# Altium PCB MAX51.PcbDoc (part 2 of 3)
Units mil, origin at the board's own origin, x right, y up, seen from the top; angles counter-clockwise.
Board outline 4625 x 3470 mil, 2 copper layers (Top Layer, Bottom Layer); 152 components, 205 nets, 817 pads, 224 vias.
Unrouted connection lines stored in the file: 41.
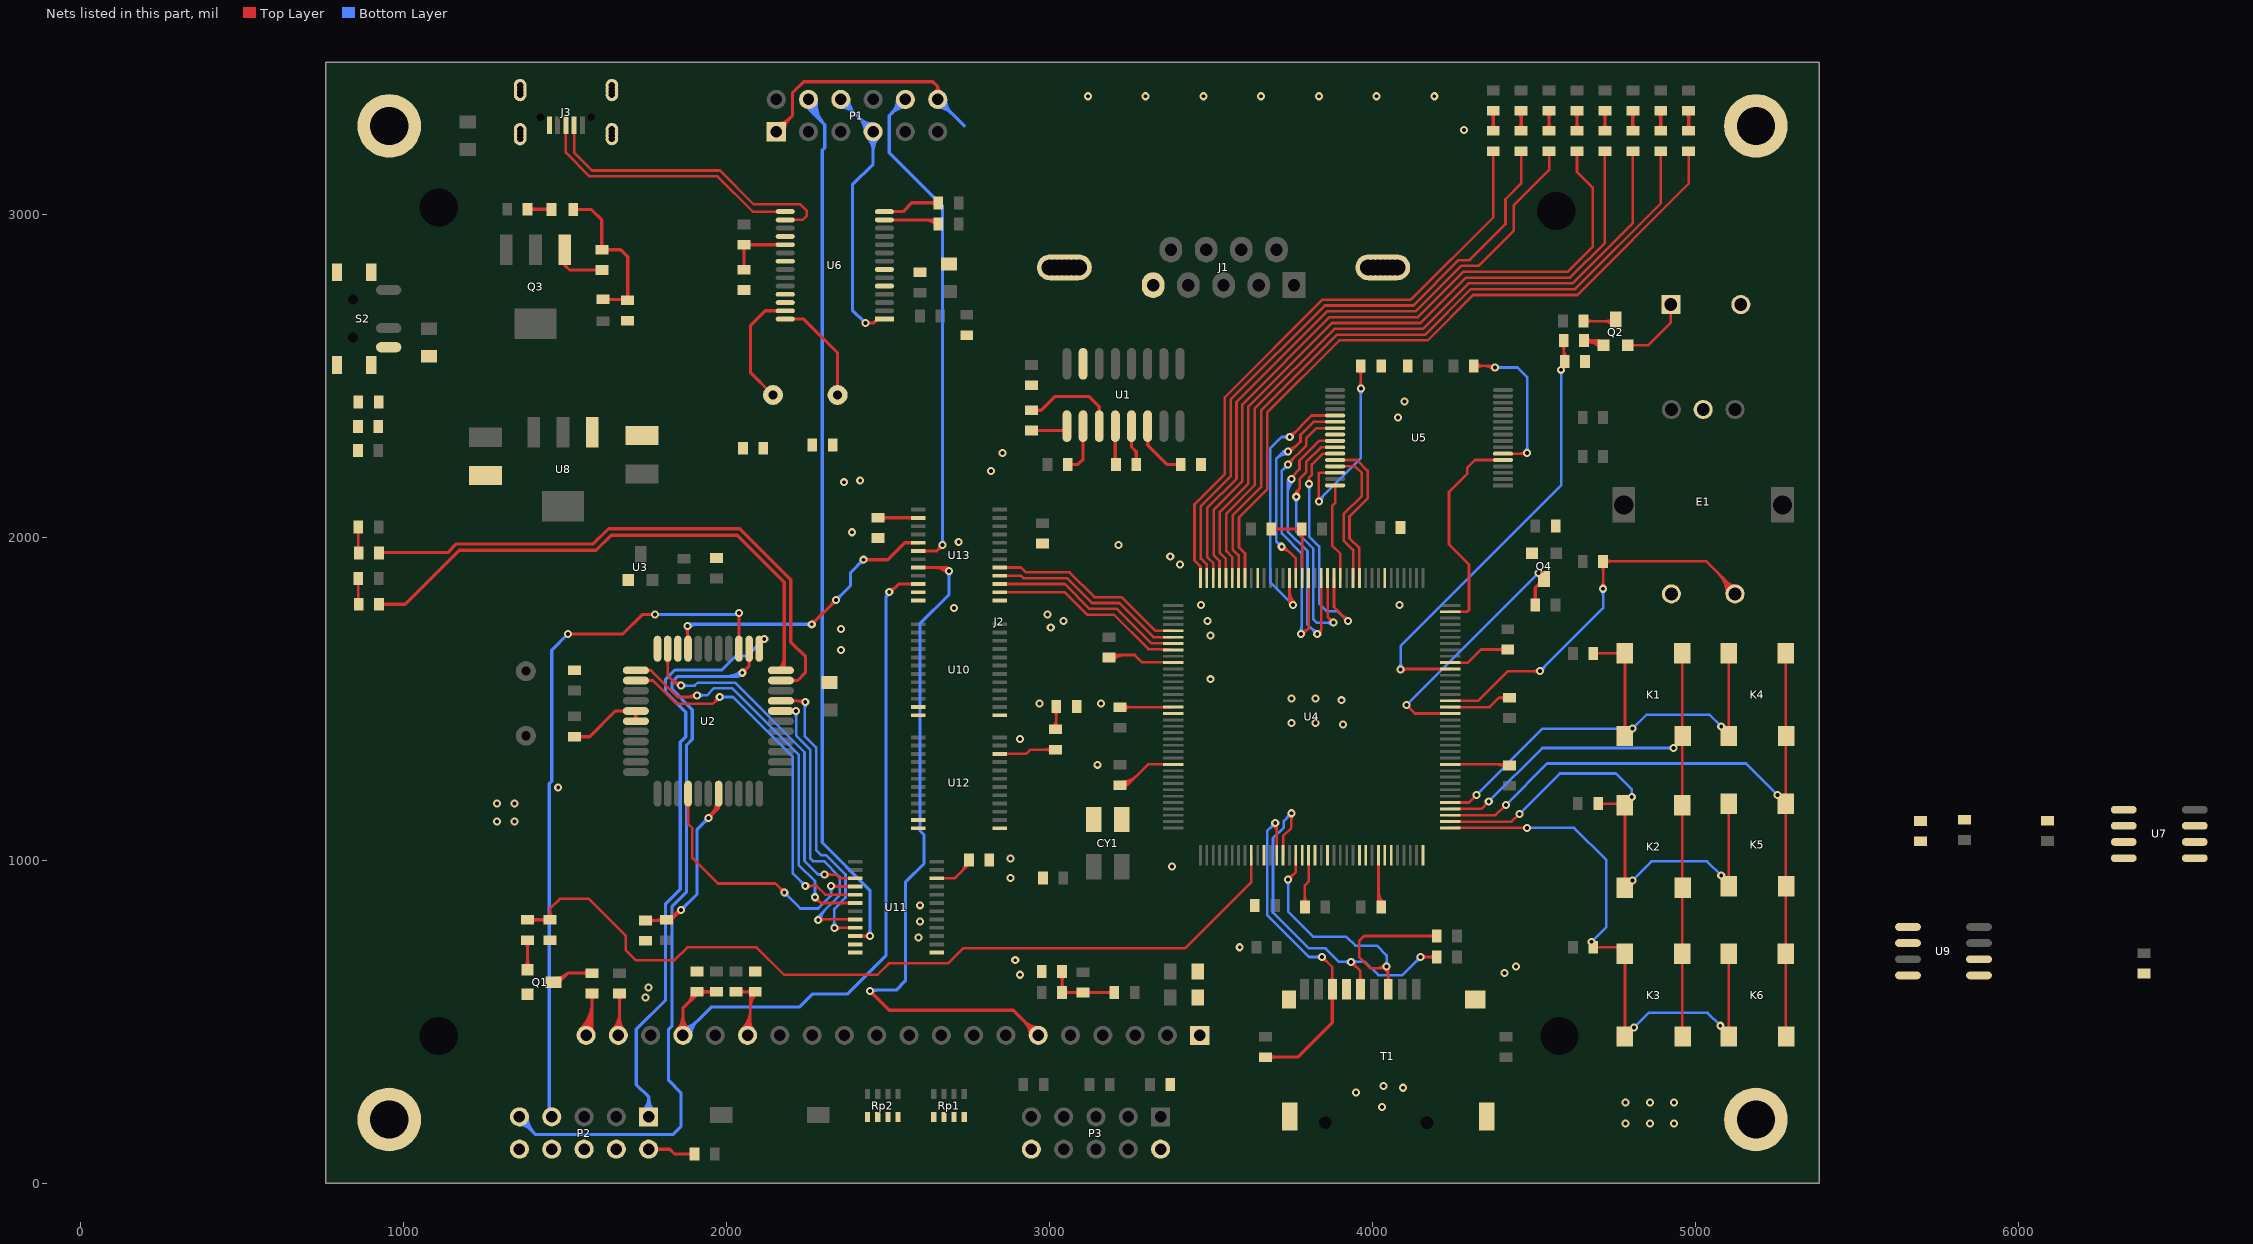
[diagram p2: the nets of this part, all layers, seen from the top]

## Via types
v1: diameter 25, hole 12, Top Layer to Bottom Layer, 224 vias

## Nets (pads, with @x,y where several pads share a name; then routed paths per layer and width w, separated by ;. In a path a pad name is that pad's centre, name@x,y a point inside that pad or via, vN(x,y) a via of type N, cw(c..) or ccw(c..) an arc to the next point about the centre after c; other vN are vias at no path point) (continued)
CE2: R12.1 U5.6 | length 672.4
  Top Layer w8: R12.1@4315,2530 4375,2530 v1(4380,2525) ; R12.1@4322.78,2522.22 cw(c4341.56,2503.44) 4341.56,2530 cw(c4341.56,2556.56) R12.1@4322.78,2537.78 ; 4347.41,2530 cw(c4347.41,2492.41) v1@4373.99,2518.99 ; 4366.72,2530 cw(c4366.72,2511.72) v1@4379.65,2524.65 ; U5.6@4405,2258.43 4478.43,2258.43 v1(4480,2260) ; 4455.68,2258.42 ccw(c4455.68,2284.32) v1@4473.99,2266.01 ; 4463.28,2258.42 cw(c4463.28,2243.28) v1@4473.99,2253.99
  Bottom Layer w8: v1(4380,2525) 4450,2525 4480,2495 v1(4480,2260) ; v1@4386.01,2518.99 cw(c4400.52,2504.48) 4400.52,2525 cw(c4400.52,2545.52) v1@4386.01,2531.01 ; v1@4473.99,2266.01 ccw(c4459.48,2280.52) 4480,2280.52 ccw(c4500.52,2280.52) v1@4486.01,2266.01
CLK_40MHZ: C24.1 CY1.3 U4.18
CPLD_NRST: Q4.C R10.1 U4.91 | length 818.6
  Top Layer w8: v1(4106,1480) 4132.16,1453.84 U4.91@4242.13,1453.84 ; Q4.C@4515,1887 v1(4515,1889)
  Top Layer w10: R10.1@4505,1790 4505,1843 Q4.C@4532,1870
  Bottom Layer w8: v1(4106,1480) v1(4515,1889)
CTL_NOE: R57.2 U11.22 | length 199.9
  Top Layer w8: U11.22@2651.97,943.82 2708.82,943.82 2757,992 R57.2@2757,1010 ; 2727.56,962.56 ccw(c2695.13,995) R57.2@2741,995 ; 2741.22,976.22 ccw(c2722.44,995) R57.2@2749,995
D_N: J3.2 U6.16 | length 967.2
  Top Layer w8: J3.2@1529.41,3275 1529.41,3190.59 1585,3135 1980.46,3135 2085.46,3030 2230,3030 2250,3010 2250,2995 2237.09,2982.09 U6.16@2182.91,2982.09
D_P: J3.3 U6.15 | length 839.2
  Top Layer w8: J3.3@1503.82,3275 1503.82,3190.73 1577.54,3117 1973,3117 2082.32,3007.68 U6.15@2182.91,3007.68
DATA0: U4.130 U5.21 | length 1052.5
  Top Layer w8: 3744.1,1798.2 ccw(c3763.2,1798.2) v1@3749.7,1784.7 ; 3744.1,1817.52 ccw(c3782.52,1817.52) v1@3755.35,1790.35 ; 3744.1,1836.83 ccw(c3801.83,1836.83) v1@3761.01,1796.01 ; U4.130@3744.1,1873.13 3744.1,1800.9 ; v1(3745,2310) 3745,2309.09 3812.45,2376.53 U5.21@3885.31,2376.53 ; v1@3745,2318.5 ccw(c3745,2341.22) 3761.07,2325.16 ; v1@3746.71,1791.88 ccw(c3737.23,1794.02) 3744.1,1800.9 ; v1@3753.12,1798.29 cw(c3750.98,1807.77) 3744.1,1800.9 ; v1@3753.5,2310 cw(c3771.82,2310) 3758.87,2322.95 ; v1(3755,1790) 3744.1,1800.9
  Bottom Layer w8: v1@3738.99,2303.99 ccw(c3724.48,2289.48) 3724.48,2310 ccw(c3724.48,2330.52) v1@3738.99,2316.01 ; v1(3745,2310) 3720,2310 3684.5,2274.5 3684.5,1860.5 v1(3755,1790) ; v1@3746.5,1790 ccw(c3725.98,1790) 3740.49,1804.51 ccw(c3755,1819.02) v1@3755,1798.5
DATA1: U4.129 U5.22 | length 850.4
  Top Layer w8: v1@3720,1961.5 cw(c3720,1922.69) 3747.44,1950.13 ; v1@3720,1969.5 cw(c3720,1950.01) 3733.78,1963.79 ; v1(3720,1970) 3727.57,1970 3763.79,1933.79 U4.129@3763.79,1873.13 ; v1(3740,2265) 3747.48,2265 3778.18,2295.71 3778.18,2316.82 3818.22,2356.85 U5.22@3885.31,2356.85 ; v1@3740,2265.5 ccw(c3740,2284.76) 3753.62,2271.14 ; v1@3740,2273.5 ccw(c3740,2312.07) 3767.27,2284.8
  Bottom Layer w8: v1@3711.5,1970 ccw(c3690.98,1970) 3705.49,1984.51 ccw(c3720,1999.02) v1@3720,1978.5 ; 3715.37,2254.92 cw(c3738.58,2231.71) v1@3739.98,2264.5 ; v1(3720,1970) 3702.5,1987.5 3702.5,2242.04 ; v1@3732.59,2260.83 ccw(c3725.46,2256.81) 3725.46,2265 ; v1@3732.59,2269.17 cw(c3725.46,2273.19) 3725.46,2265 ; v1@3739.64,2256.51 ccw(c3737.52,2207.02) 3702.5,2242.05 ; v1(3740,2265) 3725.46,2265 ; 3702.5,2242.04 3725.46,2265
DATA2: U4.127 U5.23 | length 1073.3
  Top Layer w8: v1(3740,2225) 3740,2227.52 3796.18,2283.71 3796.18,2306.18 3827.16,2337.16 U5.23@3885.31,2337.16 ; v1@3740,2233.5 ccw(c3740,2247.93) 3750.2,2237.73 ; v1@3748.5,2225 cw(c3775.11,2225) 3756.29,2243.82 ; v1(3780,1700) 3786.31,1700 3803.16,1716.84 ; v1@3780.63,1708.48 ccw(c3782.77,1737.23) 3803.16,1716.84 ; U4.127@3803.16,1873.13 3803.16,1716.84
  Bottom Layer w8: v1@3731.5,2225 cw(c3710.98,2225) 3725.49,2210.49 cw(c3740,2195.98) v1@3740,2216.5 ; v1(3740,2225) 3720.5,2205.5 3720.5,2010.5 3781.5,1949.5 3781.5,1701.5 v1(3780,1700) ; v1@3773.99,1706.01 ccw(c3755.86,1724.14) 3781.5,1724.14 ; 3781.5,1716.9 ccw(c3796.9,1716.9) v1@3786.01,1706.01
DATA3: U4.125 U5.25 | length 1051.9
  Top Layer w8: v1@3750,2185 3775.2,2210.2 3775.2,2237.27 3835.73,2297.8 U5.25@3885.31,2297.8 ; v1(3830,1700) 3842.53,1712.53 ; v1@3830.93,1708.45 ccw(c3832.48,1722.58) 3842.53,1712.53 ; v1@3838.45,1700.93 cw(c3852.58,1702.48) 3842.53,1712.53 ; U4.125@3842.53,1873.13 3842.53,1712.53
  Bottom Layer w8: 3738.5,2131.72 cw(c3798.28,2131.72) v1@3756.01,2173.99 ; 3738.5,2151.03 cw(c3778.97,2151.03) v1@3750.35,2179.65 ; 3738.5,2170.34 cw(c3759.66,2170.34) v1@3744.7,2185.3 ; v1(3750,2180) 3738.5,2168.5 3738.5,2017.96 3800,1956.46 3800,1730 v1(3830,1700) ; v1@3821.5,1700 ccw(c3800.98,1700) 3815.49,1714.51 ccw(c3830,1729.02) v1@3830,1708.5
DATA4: U4.124 U5.26 | length 1001.9
  Top Layer w8: v1@3760.63,2132.29 ccw(c3756.02,2140) 3765,2140 ; v1(3765,2125) 3765,2140 ; v1@3765.45,2125.22 cw(c3779.88,2132.21) 3768.54,2143.54 ; v1@3769.37,2132.29 cw(c3773.98,2140) 3765,2140 ; v1@3772.65,2128.7 cw(c3790.6,2137.4) 3776.5,2151.5 ; U4.124@3862.21,1873.13 3862.21,1752.79 v1(3880,1735) ; v1@3871.5,1735 ccw(c3850.98,1735) 3865.49,1749.51 ccw(c3880,1764.02) v1@3880,1743.5 ; U5.26@3885.31,2278.11 3841.5,2278.11 3795.66,2232.27 3795.66,2200.2 3776.5,2181.04 3776.5,2151.5 ; 3765,2140 3776.5,2151.5
  Bottom Layer w8: v1@3758.99,2118.99 cw(c3744.48,2104.48) 3765,2104.48 cw(c3785.52,2104.48) v1@3771.01,2118.99 ; v1(3765,2125) 3765,2016.91 3818,1963.91 3818,1745 3828,1735 v1(3880,1735) ; v1@3873.99,1728.99 ccw(c3859.48,1714.48) 3859.48,1735 ccw(c3859.48,1755.52) v1@3873.99,1741.01
DATA5: U4.123 U5.27 | length 920.1
  Top Layer w8: v1@3799.31,2171.32 ccw(c3787.82,2184.09) 3805,2184.09 ; v1(3805,2165) 3805,2184.09 ; v1@3810.69,2171.32 cw(c3822.18,2184.09) 3805,2184.09 ; U4.123@3881.9,1873.13 3881.9,1783.1 v1(3925,1740) ; U5.27@3885.31,2258.43 3847.27,2258.43 3813.66,2224.82 3813.66,2192.75 3805,2184.09 ; v1@3916.5,1740 ccw(c3895.98,1740) 3910.49,1754.51 ccw(c3925,1769.02) v1@3925,1748.5
  Bottom Layer w8: v1@3798.99,2158.99 cw(c3784.48,2144.48) 3805,2144.48 cw(c3825.52,2144.48) v1@3811.01,2158.99 ; v1(3805,2165) 3805,2002.37 3836,1971.37 3836,1795 3861,1770 3895,1770 v1(3925,1740) ; v1@3916.5,1740 ccw(c3895.98,1740) 3910.49,1754.51 ccw(c3925,1769.02) v1@3925,1748.5
DATA6: U4.119 U5.28 | length 482.6
  Top Layer w8: U5.28@3885.31,2238.74 3952.53,2238.74 3986,2205.27 3986,2120.09 3930,2064.09 3930,1996.37 3960.64,1965.73 U4.119@3960.64,1873.13
DATA7: U4.120 U5.29 | length 451.4
  Top Layer w8: U5.29@3885.31,2219.05 3946.76,2219.05 3968,2197.81 3968,2127.54 3912,2071.54 3912,1988.91 3940.95,1959.96 U4.120@3940.95,1873.13
DI: R28.1 T1.3 U4.52 | length 1315.9
  Top Layer w8: v1(3740,940) 3763.79,963.79 U4.52@3763.79,1014.87 ; v1@3740,948.5 ccw(c3740,969.02) 3754.51,954.51 ccw(c3769.02,940) v1@3748.5,940 ; 4012.41,665 ccw(c4012.41,702.59) v1@4038.99,676.01 ; 4031.72,665 ccw(c4031.72,683.28) v1@4044.65,670.35 ; v1@4038.99,663.99 cw(c4012.41,637.41) 4050,637.41 ; T1.3@4043.08,624.63 ccw(c4026.39,641.33) 4050,641.33 ccw(c4073.61,641.33) T1.3@4056.92,624.63 ; v1@4044.65,669.65 cw(c4031.72,656.72) 4050,656.72 ; v1(4045,670) v1@4050,665 ; T1.3@4050,600 v1@4050,665 ; R28.1@4192.22,757.22 ccw(c4173.44,738.44) 4173.44,765 ccw(c4173.44,791.56) R28.1@4192.22,772.78 ; R28.1@4200,765 3975,765 3960,750 3960,700 3995,665 v1@4050,665
  Bottom Layer w8: v1@3733.99,933.99 cw(c3719.48,919.48) 3740,919.48 cw(c3760.52,919.48) v1@3746.01,933.99 ; v1(3740,940) 3740,841.37 3818.87,762.5 3920.43,762.5 3947.93,735 4015,735 4045,705 v1(4045,670) ; v1@4038.99,676.01 ccw(c4024.48,690.52) 4045,690.52 ccw(c4065.52,690.52) v1@4051.01,676.01
DO: R30.1 T1.7 U4.49 | length 1336.1
  Top Layer w8: v1@3693.99,1108.99 cw(c3668.05,1083.05) 3704.73,1083.05 ; v1@3699.65,1114.65 cw(c3687.37,1102.37) 3704.73,1102.37 ; v1(3700,1115) 3704.73,1110.27 U4.49@3704.73,1014.87 ; v1@3845,691.5 cw(c3845,670.98) 3859.51,685.49 cw(c3874.02,700) v1@3853.5,700 ; v1(3845,700) 3876.77,668.23 T1.7@3876.77,600 ; T1.7@3869.86,624.63 ccw(c3853.16,641.33) 3876.77,641.33 ccw(c3900.38,641.33) T1.7@3883.69,624.63
  Top Layer w10: R30.1@3670,390 3770,390 3876.77,496.77 T1.7@3876.77,600 ; R30.1@3682.07,382.93 cw(c3699.14,365.86) 3699.14,390 cw(c3699.14,414.14) R30.1@3682.07,397.07 ; T1.7@3870.56,576.08 cw(c3855.58,561.09) 3876.77,561.09 cw(c3897.97,561.09) T1.7@3882.98,576.08
  Bottom Layer w8: v1@3691.5,1115 cw(c3670.98,1115) 3685.49,1100.49 cw(c3700,1085.98) v1@3700,1106.5 ; v1(3700,1115) 3675,1090 3675,830 3805,700 v1(3845,700) ; v1@3838.99,693.99 ccw(c3824.48,679.48) 3824.48,700 ccw(c3824.48,720.52) v1@3838.99,706.01
DX: E1.4 R40.1 U4.93 | length 1601.8
  Top Layer w8: U4.93@4242.13,1493.21 4328.21,1493.21 4420,1585 v1(4520,1585) ; v1@4513.99,1578.99 ccw(c4499.48,1564.48) 4499.48,1585 ccw(c4499.48,1605.52) v1@4513.99,1591.01 ; R40.1@4707.22,1912.22 cw(c4688.44,1893.44) 4715,1893.44 cw(c4741.56,1893.44) R40.1@4722.78,1912.22 ; v1@4708.99,1846.01 ccw(c4694.48,1860.52) 4715,1860.52 ccw(c4735.52,1860.52) v1@4721.01,1846.01 ; v1(4715,1840) R40.1@4715,1925 5035,1925 5123.43,1836.57 E1.4@5123.43,1824.13 ; R40.1@4722.78,1917.22 cw(c4741.56,1898.44) 4741.56,1925 cw(c4741.56,1951.56) R40.1@4722.78,1932.78 ; 5071.05,1888.95 cw(c5006.23,1824.13) E1.4@5097.9,1824.13 ; 5084.71,1875.29 cw(c5033.55,1824.13) E1.4@5105.9,1824.13 ; 5098.36,1861.64 cw(c5060.86,1824.13) E1.4@5113.9,1824.13 ; 5101.09,1858.92 ccw(c5123.43,1881.26) E1.4@5123.43,1849.66
  Bottom Layer w8: v1(4520,1585) 4715,1780 v1(4715,1840) ; v1@4520,1593.5 ccw(c4520,1614.02) 4534.51,1599.51 ccw(c4549.02,1585) v1@4528.5,1585 ; v1@4708.99,1833.99 cw(c4694.48,1819.48) 4715,1819.48 cw(c4735.52,1819.48) v1@4721.01,1833.99
E: J2.6 U13.8 | length 2437.3
  Top Layer w10: v1@2445,587.5 cw(c2445,569.39) 2457.8,582.2 cw(c2470.61,595) v1@2452.5,595 ; v1(2445,595) 2505,535 2888.7,535 J2.6@2966.18,457.52 ; U13.8@2595,1905.87 2684.13,1905.87 2690,1900 v1(2690,1895) ; 2645.66,1905.87 cw(c2645.66,1850.66) v1@2684.7,1889.7 ; 2669.8,1905.87 cw(c2669.8,1874.8) v1@2691.77,1896.77 ; J2.6@2941.65,457.52 ccw(c2882.44,457.52) 2924.31,499.39 ccw(c2966.18,541.26) J2.6@2966.18,482.05 ; J2.6@2951.65,457.52 ccw(c2916.58,457.52) 2941.38,482.32 ccw(c2966.18,507.12) J2.6@2966.18,472.05
  Bottom Layer w10: v1(2445,595) 2447.5,597.5 2526.39,597.5 2555,626.11 2555,931.72 2612.5,989.22 2612.5,1079.07 2600,1091.57 2600,1731.72 2690,1821.72 v1@2690,1900 ; v1@2450.3,589.7 cw(c2469.14,570.86) 2469.14,597.5 ; v1@2684.7,1889.7 cw(c2671.89,1876.89) 2690,1876.89 cw(c2708.11,1876.89) v1@2695.3,1889.7
EPM_RXD: P1.4 U11.10 | length 3019.7
  Top Layer w10: U11.10@2400,764.68 2444.68,764.68 v1(2445,765) ; 2426.13,764.68 ccw(c2426.13,783.87) v1@2439.7,770.3 ; 2427.65,764.68 cw(c2427.65,747.65) v1@2439.7,759.7
  Bottom Layer w10: P1.4@2249.57,3355.69 ccw(c2292.1,3350.25) 2261.78,3319.93 ; P1.4@2255,3355 2255,3326.72 2305,3276.72 ; P1.4@2259.49,3354.43 ccw(c2317.64,3346.98) 2276.19,3305.53 ; P1.4@2269.41,3353.16 ccw(c2343.18,3343.71) 2290.59,3291.12 ; P1.4@2279.33,3351.89 ccw(c2368.72,3340.45) 2305,3276.72 ; v1@2439.7,770.3 ccw(c2426.89,783.11) 2445,783.11 ccw(c2463.11,783.11) v1@2450.3,770.3 ; v1(2445,765) 2445,906.87 2297.5,1054.37 2297.5,3197.5 2305,3205 2305,3276.72
EPM_TXD: P1.10 U13.6 | length 1756.5
  Top Layer w10: U13.6@2595,1957.05 2652.05,1957.05 v1(2670,1975) ; v1@2662.5,1975 cw(c2644.39,1975) 2657.2,1962.2 cw(c2670,1949.39) v1@2670,1967.5
  Bottom Layer w10: P1.10@2530.47,3355 cw(c2471.26,3355) 2513.13,3313.13 cw(c2555,3271.26) P1.10@2555,3330.47 ; P1.10@2540.47,3355 cw(c2505.4,3355) 2530.2,3330.2 cw(c2555,3305.4) P1.10@2555,3340.47 ; P1.10@2555,3355 2505,3305 2505,3190 2670,3025 v1(2670,1975) ; v1@2664.7,1980.3 ccw(c2651.89,1993.11) 2670,1993.11 ccw(c2688.11,1993.11) v1@2675.3,1980.3
GND: C2.1 C4.1 C6.2 C8.2 C9.2 C10.2 C11.2 C12.2 C13.2 C14.2 C15.2 C16.2 C17.2 C18.2 C19.2 C20.2 C21.2 C22.2 C24.2 C25.1 C26.1 C27.1 C28.1 C29.2 C30.1 C31.2 C32.1 C33.1 C34.1 C37.2 C38.2 CY1.2 E1.3 E1.5 HL13.k HL14.k J1.0 J1.5 J2.1 J3.0 J3.5 LS1.2 P2.4 P2.6 P2.8 P2.10 P3.2 P3.10 pad.0 Q1.E Q4.E R4.1 R5.1 R6.1 R11.2 R15.2 R17.1 R23.2 R37.2 R50.2 R53.1 R54.1 R57.1 R58.1 R59.2 R60.1 R61.1 Rp1.5 Rp1.6 Rp1.7 Rp1.8 Rp2.5 Rp2.6 Rp2.7 Rp2.8 S2.0 T1.6 T1.10 T1.11 T1.12 T1.13 U1.15 U2.16 U2.17 U3.1 U4.10 U4.17 U4.26 U4.47 U4.54 U4.65 U4.83 U4.92 U4.99 U4.115 U4.128 U4.135 U5.24 U6.7 U6.18 U6.21 U6.25 U6.26 U7.1 U7.2 U7.3 U7.4 U8.1 U9.4 U10.11 U10.12 U10.13 U11.11 U11.12 U11.13 U12.11 U12.12 U12.13 U13.11 U13.12 U13.13 | length 2846.6
  Top Layer w8: R58.1@3012.22,1412.78 ccw(c2988.62,1436.38) 3022,1436.38 ; C24.2@3014.22,1462.22 cw(c2995.44,1443.44) 3022,1443.44 cw(c3048.56,1443.44) C24.2@3029.78,1462.22 ; R58.1@3020,1405 3022,1407 C24.2@3022,1475 ; 3022,1426.73 ccw(c3041.73,1426.73) R58.1@3027.78,1412.78 ; C10.2@3192.12,1624.88 cw(c3216.56,1600.44) 3216.56,1635 ; C10.2@3195,1635 3264.54,1635 3286.54,1613.01 3346.24,1613.01 3346.57,1612.68 3382.51,1612.68 U4.10@3383.87,1611.32 ; C10.2@3197.78,1619.22 cw(c3235.87,1581.13) 3235.87,1635 ; C20.2@3220,1232 3242,1232 ; C21.2@3220,1473 3383.34,1473 U4.17@3383.87,1473.53 ; C20.2@3225,1227 ccw(c3225,1255.97) 3245.49,1235.49 ; C20.2@3225,1235 ccw(c3225,1283.28) 3259.14,1249.14 ; C20.2@3225,1243 ccw(c3225,1310.6) 3272.8,1262.8 ; C21.2@3232.78,1465.22 cw(c3251.56,1446.44) 3251.56,1473 cw(c3251.56,1499.56) C21.2@3232.78,1480.78 ; C20.2@3235.03,1227.49 cw(c3242,1224.36) 3242,1232 ; C20.2@3235.03,1236.51 ccw(c3242,1239.64) 3242,1232 ; U4.26@3383.87,1296.36 3306.36,1296.36 3242,1232 ; C11.2@3688,2025 C12.2@3782,2025 3783.47,2023.53 U4.128@3783.47,1873.13 ; C11.2@3695.78,2017.22 cw(c3714.56,1998.44) 3714.56,2025 cw(c3714.56,2051.56) C11.2@3695.78,2032.78 ; C12.2@3774.22,2012.22 cw(c3751.89,1989.89) 3783.47,1989.89 ; C12.2@3774.22,2017.22 ccw(c3755.44,1998.44) 3755.44,2025 ccw(c3755.44,2051.56) C12.2@3774.22,2032.78 ; 3783.47,1997 cw(c3805,1997) C12.2@3789.78,2012.22 ; C18.2@3784.22,867.78 ccw(c3765.44,886.56) 3792,886.56 ccw(c3818.56,886.56) C18.2@3799.78,867.78 ; C18.2@3792,855 3792,922 3803.16,933.16 U4.54@3803.16,1014.87 ; 4019.69,887.3 ccw(c4055.3,887.3) C17.2@4030.12,862.12 ; 4019.69,906.61 ccw(c4074.61,906.61) C17.2@4035.78,867.78 ; U4.65@4019.69,1014.87 4019.69,863.31 C17.2@4028,855 ; U4.83@4242.13,1296.36 4421.64,1296.36 C16.2@4425,1293 ; U4.92@4242.13,1473.53 4363.53,1473.53 4393,1503 C15.2@4425,1503 ; U4.99@4242.13,1611.32 4296.32,1611.32 4337,1652 C14.2@4420,1652 ; 4385.33,1296.36 cw(c4385.33,1258.33) C16.2@4412.22,1285.22 ; 4401.56,1296.36 ccw(c4401.56,1311.44) C16.2@4412.22,1300.78 ; 4404.64,1296.36 cw(c4404.64,1277.64) C16.2@4417.88,1290.88 ; C14.2@4407.22,1644.22 ccw(c4388.44,1625.44) 4388.44,1652 ccw(c4388.44,1678.56) C14.2@4407.22,1659.78 ; C15.2@4412.22,1495.22 ccw(c4393.44,1476.44) 4393.44,1503 ccw(c4393.44,1529.56) C15.2@4412.22,1510.78
  Top Layer w10: C8.2@1530,1382 1577,1382 1656.5,1461.5 U2.16@1720.59,1461.5 U2.17@1720.59,1430 ; C8.2@1542.07,1374.93 cw(c1559.14,1357.86) 1559.14,1382 cw(c1559.14,1406.14) C8.2@1542.07,1389.07 ; U2.16@1687.23,1456.68 ccw(c1675.6,1445.05) 1675.6,1461.5 ccw(c1675.6,1477.94) U2.16@1687.23,1466.31 ; U2.17@1715.77,1434.82 ccw(c1704.15,1446.44) 1720.59,1446.44 ccw(c1737.03,1446.44) U2.17@1725.41,1434.82 ; U2.16@1715.77,1456.68 cw(c1704.15,1445.05) 1720.59,1445.05 cw(c1737.03,1445.05) U2.16@1725.41,1456.68
  other v1: 4785,185 4860,185 4935,185 4030,235 4785,250 4860,250 4935,250 3950,280 4095,295 4035,300 1750,575 1760,605 2910,645 4410,650 4445,670 2895,690 3590,730 2595,760 2600,810 2600,860 2880,945 3380,980 2880,1005 1290,1120 1345,1120 1290,1175 1345,1175 1480,1225 3150,1295 2910,1375 3910,1420 3750,1425 3825,1425 2970,1485 3160,1485 3905,1495 3750,1500 3825,1500 3500,1560 2355,1650 3500,1695 2355,1715 3005,1720 3045,1740 3490,1740 2995,1760 2705,1780 3470,1790 4085,1790 3405,1915 3375,1940 3215,1975 2720,1985 2390,2015 2365,2170 2415,2175 2820,2205 2855,2260 4080,2370 4100,2420 4285,3260 3120,3365 3298.75,3365 3477.5,3365 3656.25,3365 3835,3365 4013.75,3365 4192.5,3365
ISP_MISO: P2.9 U2.2 | length 2552.5
  Top Layer w10: v1(2050,1580) 2070.98,1600.98 U2.2@2070.98,1654.41 ; v1@2050,1587.5 ccw(c2050,1605.61) 2062.8,1592.8 ccw(c2075.61,1580) v1@2057.5,1580 ; U2.2@2066.17,1621.05 cw(c2054.54,1609.42) 2070.98,1609.42 cw(c2087.43,1609.42) U2.2@2075.8,1621.05
  Bottom Layer w10: P2.9@1360,180.47 cw(c1360,133.33) 1393.34,166.66 ; P2.9@1360,205 1360,200 1410,150 1835,150 1860,175 1860,280 1821.65,318.35 1821.65,475.96 1832.5,486.81 1832.5,856.39 1877.5,901.39 1877.5,1356.39 1895,1373.89 1895,1466.11 1832.5,1528.61 1832.5,1551.39 1849.61,1568.5 2038.5,1568.5 v1(2050,1580) ; P2.9@1374.53,205 ccw(c1421.67,205) 1388.34,171.66 ; P2.9@1384.53,205 ccw(c1455.81,205) 1405.41,154.59 ; 2004.13,1568.5 ccw(c2004.13,1625.87) v1@2044.7,1585.3 ; 2028.27,1568.5 ccw(c2028.27,1601.73) v1@2051.77,1578.23
ISP_MOSI: P2.1 U2.1 | length 1971.1
  Top Layer w10: v1(2118,1685) v1@2122,1681
  Bottom Layer w10: P2.1@1742.66,222.34 ccw(c1700.79,264.21) 1760,264.21 ccw(c1819.21,264.21) P2.1@1777.34,222.34 ; P2.1@1749.73,215.27 ccw(c1724.93,240.07) 1760,240.07 ccw(c1795.07,240.07) P2.1@1770.27,215.27 ; P2.1@1760,205 1760,266.65 1721.65,305 1721.65,475.96 1812.5,566.81 1812.5,864.67 1857.5,909.67 1857.5,1364.68 1875,1382.18 1875,1457.82 1812.5,1520.32 1812.5,1559.68 1841.32,1588.5 1986.87,1588.5 2030.37,1632 2065,1632 v1(2118,1685)
ISP_SCK: P2.7 U2.3 | length 2189.7
  Top Layer w10: v1(1510,1700) 1680,1700 1740,1760 v1(1780,1760) ; U2.3@2039.49,1654.41 2039.49,1764.49 v1(2040,1765)
  Bottom Layer w10: P2.7@1460,205 1452.5,212.5 1452.5,1236.39 1460,1243.89 1460,1650 v1(1510,1700) ; v1(1780,1760) 2035,1760 v1(2040,1765)
KEY_C0: K1.1 K1.3 K2.1 K2.3 K3.1 K3.3 U4.76 | length 1955.2
  Top Layer w8: U4.76@4242.13,1158.57 4338.57,1158.57 v1(4361,1181) ; K1.3@4960,1639.91 K2.3@4960,1169.91 K3.3@4960,709.91 4960,455 K3.1@4961,454
  Bottom Layer w8: v1(4361,1181) 4527,1347 v1(4933,1347)
KEY_C1: K4.1 K4.3 K5.1 K5.3 K6.1 K6.3 U4.75 | length 2339.9
  Top Layer w8: U4.75@4242.13,1138.88 4381.88,1138.88 v1(4414,1171) ; v1(5255,1202) 5281,1176 K4.3@5281,1639.91 ; K6.1@5281,455 K6.3@5281,709.91 K5.3@5281,1174.91
  Bottom Layer w8: v1(4414,1171) 4542,1299 5158,1299 v1(5255,1202)
KEY_L0: K1.2 K1.4 K4.2 K4.4 R24.1 U4.77 | length 1608.8
  Top Layer w8: U4.77@4242.13,1178.25 4299.25,1178.25 v1(4323,1202) ; R24.1@4685,1640 4782.74,1640 K1.4@4782.83,1639.91 K1.2@4782.83,1384 v1(4806,1407.17) ; K4.2@5103.83,1384 K4.4@5103.83,1639.91
  Bottom Layer w8: v1(4323,1202) 4528.17,1407.17 v1(4806,1407.17) 4848.83,1450 5045,1450 v1(5081,1414)
KEY_L1: K2.2 K2.4 K5.2 K5.4 R25.1 U4.74 | length 1614.9
  Top Layer w8: U4.74@4242.13,1119.2 4432.2,1119.2 v1(4456,1143) ; R25.1@4700,1175 4777.74,1175 K2.4@4782.83,1169.91 K2.2@4782.83,914 v1(4806,937.17) ; K5.2@5103.83,919 K5.4@5103.83,1174.91
  Bottom Layer w8: v1(4456,1143) 4581,1268 4755,1268 4804,1219 v1(4804,1195) ; v1(4806,937.17) 4864.83,996 5037,996 v1(5081,952)
KEY_L2: K3.2 K3.4 K6.2 K6.4 R26.1 U4.73 | length 1767.7
  Top Layer w8: U4.73@4242.13,1099.51 v1(4479.51,1099.51) ; R26.1@4679,736 v1(4679,747) ; R26.1@4685,730 4762.74,730 K3.4@4782.83,709.91 K3.2@4782.83,454 v1(4811,482.17) ; K6.2@5103.83,454 K6.4@5103.83,709.91
  Bottom Layer w8: v1(4479.51,1099.51) 4625.49,1099.51 4725,1000 4725,793 v1(4679,747) ; v1(4811,482.17) 4855.83,527 5039,527 5078,488 v1(5078,487)
LCD_E: U4.6 U13.16 | length 615.7
  Top Layer w8: U13.16@2846.97,1880.28 2912.9,1880.28 2920.18,1873 3055.63,1873 3132.63,1796 3217.18,1796 3323.11,1690.06 U4.6@3383.87,1690.06
LCD_NRST: U4.8 U13.14 | length 610.8
  Top Layer w8: U13.14@2846.97,1829.09 3048.63,1829.09 3117.72,1760 3200,1760 3307,1653 3345.62,1653 3346.57,1652.05 3368.6,1652.05 3369.95,1650.69 U4.8@3383.87,1650.69
LCD_RS: U4.7 U13.15 | length 613.2
  Top Layer w8: U13.15@2846.97,1854.68 3048.49,1854.68 3125.18,1778 3209.72,1778 3316.72,1671 3375.1,1671 3375.72,1670.38 U4.7@3383.87,1670.38
LCD_RW: U4.5 U13.17 | length 618.1
  Top Layer w8: U13.17@2846.97,1905.87 2912.77,1905.87 2927.63,1891 3063.09,1891 3140.09,1814 3224.63,1814 3328.89,1709.75 U4.5@3383.87,1709.75
LED_CTL: R22.1 R23.1 U4.45 | length 2764.1
  Top Layer w8: R23.1@1447.22,822.78 ccw(c1428.44,841.56) 1455,841.56 ccw(c1481.56,841.56) R23.1@1462.78,822.78 ; R23.1@1455,815 1455,850 1485,880 1575,880 1689,766 1689,721 1720,690 1840,690 1880,730 2094.54,730 2179.54,645 2469.24,645 2504.24,680 2686.99,680 2733.77,726.78 3419.97,726.78 3625.99,932.8 U4.45@3625.99,1014.87
  Top Layer w10: R22.1@1385,815 R23.1@1455,815 ; R22.1@1397.07,807.93 cw(c1414.14,790.86) 1414.14,815 cw(c1414.14,839.14) R22.1@1397.07,822.07 ; R23.1@1442.93,807.93 ccw(c1425.86,790.86) 1425.86,815 ccw(c1425.86,839.14) R23.1@1442.93,822.07
LEDA: J2.19 R20.2 | length 299.8
  Top Layer w10: J2.19@1648.84,474.86 ccw(c1597.75,525.95) 1670,525.95 ; J2.19@1655.91,467.79 ccw(c1621.89,501.81) 1670,501.81 ; R20.2@1662.93,579.93 cw(c1645.86,562.86) 1670,562.86 cw(c1694.14,562.86) R20.2@1677.07,579.93 ; J2.19@1666.18,457.52 1670,461.34 R20.2@1670,587 ; 1670,507.51 ccw(c1716.18,507.51) J2.19@1683.52,474.86
LIB: U2.10 U11.3 | length 1314.2
  Top Layer w8: U2.10@1813.49,1620.34 cw(c1800.16,1607.01) 1819.02,1607.01 cw(c1837.87,1607.01) U2.10@1824.54,1620.34 ; U2.10@1819.02,1654.41 1819.02,1570.98 1850,1540 v1(1860,1540) ; 1828.42,1561.58 ccw(c1860,1593.16) v1@1860,1548.5 ; 1842.08,1547.92 ccw(c1860,1565.85) v1@1860,1540.5 ; v1(2305,955) 2340,955 2351.18,943.82 U11.3@2400,943.82 ; v1@2311.01,948.99 cw(c2325.52,934.48) 2325.52,955 cw(c2325.52,975.52) v1@2311.01,961.01
  Bottom Layer w8: v1(1860,1540) 1902.52,1540 1912.02,1549.5 2026.87,1549.5 2242.5,1333.87 2242.5,997.5 2285,955 ; v1@1866.01,1533.99 cw(c1880.52,1519.48) 1880.52,1540 cw(c1880.52,1560.52) v1@1866.01,1546.01 ; v1@2298.88,949.1 ccw(c2285,935.72) 2285,955 ; v1@2298.88,960.9 cw(c2285,974.28) 2285,955 ; v1@2310,955 2285,955
N5LED1: HL2.k U2.43 | length 1790.1
  Top Layer w10: HL2.k@925,1952 1137.72,1952 1164.72,1979 1588.72,1979 1635.72,2026 2042.28,2026 2200,1868.28 2200,1675 2246,1629 2246,1581 2220.98,1555.98 U2.43@2169.41,1555.98 ; U2.43@2202.77,1551.17 cw(c2214.4,1539.54) 2214.4,1555.98 cw(c2214.4,1572.43) U2.43@2202.77,1560.8
N5LED2: HL1.k U2.44 | length 1744.7
  Top Layer w10: HL1.k@925,1792 1006,1792 1173,1959 1597,1959 1644,2006 2034,2006 2180,1860 2180,1598.07 U2.44@2169.41,1587.48 ; U2.44@2164.59,1592.3 ccw(c2127.4,1629.49) 2180,1629.49 ; U2.44@2171.66,1585.23 ccw(c2151.54,1605.35) 2180,1605.35
NCE1: R11.1 U5.30 | length 776.9
  Top Layer w8: v1@3828.99,2116.01 ccw(c3814.48,2130.52) 3835,2130.52 ccw(c3855.52,2130.52) v1@3841.01,2116.01 ; v1(3835,2110) 3835,2198.34 3836.03,2199.37 U5.30@3885.31,2199.37 ; R11.1@3957.22,2517.22 cw(c3938.44,2498.44) 3965,2498.44 cw(c3991.56,2498.44) R11.1@3972.78,2517.22 ; v1@3958.99,2466.01 ccw(c3944.48,2480.52) 3965,2480.52 ccw(c3985.52,2480.52) v1@3971.01,2466.01 ; v1(3965,2460) R11.1@3965,2530
  Bottom Layer w8: v1(3835,2110) 3835,2115 3965,2245 v1(3965,2460) ; v1@3843.5,2110 cw(c3876.09,2110) 3853.05,2133.05 ; v1@3958.99,2453.99 cw(c3944.48,2439.48) 3965,2439.48 cw(c3985.52,2439.48) v1@3971.01,2453.99
NEA: R3.1 R4.2 U2.29 | length 931.5
  Top Layer w8: R3.1@1813,813 R3.1@1815,815
  Top Layer w10: R4.2@1750,813 1813,813 1828,813 v1(1860,845) ; R4.2@1762.07,805.93 cw(c1779.14,788.86) 1779.14,813 cw(c1779.14,837.14) R4.2@1762.07,820.07 ; 1781.03,813 ccw(c1781.03,843.97) R3.1@1802.93,822.07 ; 1790.69,813 cw(c1790.69,795.69) R3.1@1802.93,807.93 ; R3.1@1820,815 ccw(c1820,839.14) 1837.07,822.07 ; R3.1@1820,825 ccw(c1820,873.28) v1@1854.14,839.14 ; 1840.91,831.5 ccw(c1828.19,853.52) v1@1852.76,846.94 ; 1849.87,836.68 cw(c1855.27,827.34) v1@1858.06,837.76 ; v1@1852.5,845 cw(c1834.39,845) 1847.2,832.2 cw(c1860,819.39) v1@1860,837.5 ; v1@1943.06,1137.24 ccw(c1935.5,1165.44) 1960.79,1150.85 ; v1(1945,1130) 1976.5,1161.5 ; v1@1945,1137.5 ccw(c1945,1155.61) 1957.8,1142.8 ccw(c1970.61,1130) v1@1952.5,1130 ; v1@1946.95,1137.24 ccw(c1948.76,1143.99) 1954.81,1140.5 ; 1953.87,1138.87 ccw(c1915.7,1177.05) U2.29@1969.69,1177.05 ; 1970.94,1155.94 ccw(c1949.84,1177.05) U2.29@1979.69,1177.05 ; U2.29@1971.88,1172.04 cw(c1962.15,1161.5) 1976.5,1161.5 ; U2.29@1976.5,1205.59 1976.5,1161.5 ; U2.29@1981.11,1172.04 ccw(c1990.84,1161.5) 1976.5,1161.5
  Bottom Layer w10: v1(1860,845) 1910,895 1910,1095 v1(1945,1130) ; v1@1860,852.5 ccw(c1860,870.61) 1872.8,857.8 ccw(c1885.61,845) v1@1867.5,845 ; v1@1937.5,1130 cw(c1919.39,1130) 1932.2,1117.2 cw(c1945,1104.39) v1@1945,1122.5
NetC1_1: C1.1 U1.1 | length 115.6
  Top Layer w10: C1.1@2945,2330 3041.46,2330 U1.1@3055,2343.54
NetC1_2: C1.2 U1.3 | length 300.7
  Top Layer w10: C1.2@2945,2393 2975,2393 3017,2435 3124,2435 3155,2404 U1.3@3155,2343.54
NetC3_2: C3.2 U1.2 | length 156.2
  Top Layer w10: C3.2@3058,2225 3089,2225 3105,2241 U1.2@3105,2343.54
NetC4_2: C4.2 U1.6 | length 186
  Top Layer w10: U1.6@3305,2343.54 3305,2284 3364,2225 C4.2@3407,2225
NetC5_1: C5.1 U1.5 | length 124.8
  Top Layer w10: U1.5@3255,2343.54 3255,2279 3270,2264 C5.1@3270,2225
NetC5_2: C5.2 U1.4 | length 119.4
  Top Layer w10: U1.4@3205,2343.54 3205,2227 C5.2@3207,2225
NetC23_1: C23.1 C35.2 R52.1 R53.2 | length 494.6
  Top Layer w10: C35.2@1527,3014 1583,3014 1615,2982 R52.1@1615,2890 1673,2890 1695,2868 R53.2@1695,2733 1692,2736 C23.1@1619,2736
NetC29_1: C29.1 U6.28 Y2.2 | length 335.6
  Top Layer w10: U6.28@2182.91,2675 2240,2675 2345,2570 Y2.2@2345,2440
NetC31_1: C31.1 U6.27 Y2.1 | length 370.8
  Top Layer w10: Y2.1@2145,2440 2075,2510 2075,2655 2120.59,2700.59 U6.27@2182.91,2700.59
NetC32_2: C32.2 R46.1 U6.19 | length 205
  Top Layer w10: C32.2@2055,2828 R46.1@2055,2905 2182.6,2905 U6.19@2182.91,2905.32
NetC35_1: C35.1 R51.1 | length 74.4
  Top Layer w10: R51.1@1385,3015 1458,3015 C35.1@1459,3014
NetHL1_A: HL1.a R1.1 | length 80.1
  Top Layer w8: R1.1@861,1871.67 861,1793 HL1.a@862,1792
NetHL2_A: HL2.a R2.1 | length 80.1
  Top Layer w8: R2.1@861,2031 861,1952.33 HL2.a@862,1951.33
NetHL3_A: HL3.a R31.1 | length 137.8
  Top Layer w10: HL3.a@4972.93,3265.07 ccw(c4955.86,3282.14) 4980,3282.14 ccw(c5004.14,3282.14) HL3.a@4987.07,3265.07 ; R31.1@4972.93,3312.93 cw(c4955.86,3295.86) 4980,3295.86 cw(c5004.14,3295.86) R31.1@4987.07,3312.93 ; HL3.a@4980,3258 R31.1@4980,3320
NetHL4_A: HL4.a R32.1 | length 137.8
  Top Layer w10: HL4.a@4886.5,3265.07 ccw(c4869.43,3282.14) 4893.57,3282.14 ccw(c4917.71,3282.14) HL4.a@4900.64,3265.07 ; R32.1@4886.5,3312.93 cw(c4869.43,3295.86) 4893.57,3295.86 cw(c4917.71,3295.86) R32.1@4900.64,3312.93 ; HL4.a@4893.57,3258 R32.1@4893.57,3320
NetHL5_A: HL5.a R33.1 | length 137.8
  Top Layer w10: HL5.a@4800.07,3265.07 ccw(c4783,3282.14) 4807.14,3282.14 ccw(c4831.28,3282.14) HL5.a@4814.21,3265.07 ; R33.1@4800.07,3312.93 cw(c4783,3295.86) 4807.14,3295.86 cw(c4831.28,3295.86) R33.1@4814.21,3312.93 ; HL5.a@4807.14,3258 R33.1@4807.14,3320
NetHL6_A: HL6.a R35.1 | length 137.8
  Top Layer w10: HL6.a@4713.64,3265.07 ccw(c4696.57,3282.14) 4720.71,3282.14 ccw(c4744.86,3282.14) HL6.a@4727.79,3265.07 ; R35.1@4713.64,3312.93 cw(c4696.57,3295.86) 4720.71,3295.86 cw(c4744.86,3295.86) R35.1@4727.79,3312.93 ; HL6.a@4720.71,3258 R35.1@4720.71,3320
NetHL7_A: HL7.a R41.1 | length 137.8
  Top Layer w10: HL7.a@4627.21,3265.07 ccw(c4610.14,3282.14) 4634.29,3282.14 ccw(c4658.43,3282.14) HL7.a@4641.36,3265.07 ; R41.1@4627.21,3312.93 cw(c4610.14,3295.86) 4634.29,3295.86 cw(c4658.43,3295.86) R41.1@4641.36,3312.93 ; HL7.a@4634.29,3258 R41.1@4634.29,3320
NetHL8_A: HL8.a R42.1 | length 137.8
  Top Layer w10: HL8.a@4540.79,3265.07 ccw(c4523.71,3282.14) 4547.86,3282.14 ccw(c4572,3282.14) HL8.a@4554.93,3265.07 ; R42.1@4540.79,3312.93 cw(c4523.71,3295.86) 4547.86,3295.86 cw(c4572,3295.86) R42.1@4554.93,3312.93 ; HL8.a@4547.86,3258 R42.1@4547.86,3320
NetHL9_A: HL9.a R43.1 | length 137.8
  Top Layer w10: HL9.a@4454.36,3265.07 ccw(c4437.29,3282.14) 4461.43,3282.14 ccw(c4485.57,3282.14) HL9.a@4468.5,3265.07 ; R43.1@4454.36,3312.93 cw(c4437.29,3295.86) 4461.43,3295.86 cw(c4485.57,3295.86) R43.1@4468.5,3312.93 ; HL9.a@4461.43,3258 R43.1@4461.43,3320
NetHL10_A: HL10.a R44.1 | length 137.8
  Top Layer w10: HL10.a@4367.93,3265.07 ccw(c4350.86,3282.14) 4375,3282.14 ccw(c4399.14,3282.14) HL10.a@4382.07,3265.07 ; R44.1@4367.93,3312.93 cw(c4350.86,3295.86) 4375,3295.86 cw(c4399.14,3295.86) R44.1@4382.07,3312.93 ; HL10.a@4375,3258 R44.1@4375,3320
NetHL13_A: HL13.a R45.1
NetJ2_20: J2.20 R21.2 | length 449.3
  Top Layer w10: J2.20@1548.84,474.86 ccw(c1461.53,562.17) 1585,562.17 ; J2.20@1555.91,467.79 ccw(c1485.68,538.03) 1585,538.03 ; J2.20@1562.98,460.72 ccw(c1509.82,513.88) 1585,513.88 ; J2.20@1566.18,457.52 1585,476.34 R21.2@1585,587 ; J2.20@1570.05,453.65 ccw(c1533.96,489.74) 1585,489.74 ; R21.2@1577.93,579.93 cw(c1560.86,562.86) 1585,562.86 cw(c1609.14,562.86) R21.2@1592.07,579.93
NetLS1_1: LS1.1 Q2.E | length 218.9
  Top Layer w8: Q2.E@4791.22,2593.78 4854.78,2593.78 4925,2664 LS1.1@4925,2720
NetP2_2: P2.2 R7.2 | length 148.2
  Top Layer w10: P2.2@1760,105 1825,105 1840,90 R7.2@1902,90
NetQ1_B: Q1.B R22.2 | length 179.2
  Top Layer w10: Q1.B@1375.81,669.19 ccw(c1353.62,691.38) 1385,691.38 ccw(c1416.38,691.38) Q1.B@1394.19,669.19 ; R22.2@1377.93,744.93 cw(c1360.86,727.86) 1385,727.86 cw(c1409.14,727.86) R22.2@1392.07,744.93 ; Q1.B@1385,660 R22.2@1385,752
NetQ1_C: Q1.C R21.1 | length 235
  Top Layer w10: Q1.C@1465,622 1482,622 1510,650 ; Q1.C@1472.08,625 ccw(c1472.87,654.25) 1493.56,633.56 ; Q1.C@1472.35,635 ccw(c1473.73,686.26) 1510,650 ; R21.1@1572.93,642.93 ccw(c1555.86,625.86) 1555.86,650 ccw(c1555.86,674.14) R21.1@1572.93,657.07 ; R21.1@1585,650 1510,650
NetQ2_B: Q2.B R36.1 | length 265.5
  Top Layer w8: R36.1@4664,2601 cw(c4682.78,2582.22) 4682.78,2608.78 cw(c4682.78,2635.33) R36.1@4664,2616.56 ; R36.1@4665.2,2597.42 cw(c4676,2589.78) 4679.42,2602.56 ; R36.1@4665.75,2609.28 ccw(c4674.46,2614.31) 4671.86,2604.59 ; 4672.78,2608.78 cw(c4672.78,2559.34) Q2.B@4711.52,2590.05 ; 4689.33,2608.78 cw(c4689.33,2572.46) Q2.B@4717.79,2595.02 ; Q2.B@4705.25,2585.08 ccw(c4656.22,2546.21) R36.1@4656.22,2608.78 4701.22,2608.78 Q2.B@4716.22,2593.78
NetQ2_C: Q2.C R34.2 | length 213.6
  Top Layer w8: R34.2@4654.22,2668.78 4749.22,2668.78 Q2.C@4754.22,2673.78 ; R34.2@4662,2661 cw(c4680.78,2642.22) 4680.78,2668.78 cw(c4680.78,2695.33) R34.2@4662,2676.56 ; 4715.59,2668.78 cw(c4715.59,2628.15) Q2.C@4744.32,2656.88 ; 4725.25,2668.78 ccw(c4725.25,2695.75) Q2.C@4744.32,2676.68 ; 4734.91,2668.78 cw(c4734.91,2647.46) Q2.C@4749.98,2662.54
NetQ3_G: Q3.G R52.2 | length 168.2
  Top Layer w10: Q3.G@1500.55,2889.17 1500.55,2841.45 1515,2827 R52.2@1615,2827
NetR13_1: R13.1 R14.2 R15.1 R16.1 | length 477.3
  Top Layer w8: R16.1@3032.22,602.78 ccw(c3013.44,621.56) 3040,621.56 ccw(c3066.56,621.56) R16.1@3047.78,602.78 ; R15.1@3032.22,642.22 cw(c3013.44,623.44) 3040,623.44 cw(c3066.56,623.44) R15.1@3047.78,642.22 ; R15.1@3040,655 R16.1@3040,590 R13.1@3105,590 R14.2@3202,590 ; R16.1@3047.78,582.22 cw(c3066.56,563.44) 3066.56,590 cw(c3066.56,616.56) R16.1@3047.78,597.78 ; R13.1@3092.22,582.22 ccw(c3073.44,563.44) 3073.44,590 ccw(c3073.44,616.56) R13.1@3092.22,597.78 ; R13.1@3117.78,582.22 cw(c3136.56,563.44) 3136.56,590 cw(c3136.56,616.56) R13.1@3117.78,597.78 ; R14.2@3194.22,582.22 ccw(c3175.44,563.44) 3175.44,590 ccw(c3175.44,616.56) R14.2@3194.22,597.78
NetR47_2: R47.2 U6.13 | length 229
  Top Layer w10: U6.13@2490,2982.09 2644.91,2982.09 R47.2@2657,2970 ; 2615.75,2982.09 cw(c2615.75,2933.75) R47.2@2649.93,2967.93 ; 2639.89,2982.09 cw(c2639.89,2957.89) R47.2@2657,2975
NetR48_2: R48.2 U6.14 | length 216.2
  Top Layer w10: U6.14@2490,3007.68 2547.68,3007.68 2575,3035 R48.2@2657,3035 ; R48.2@2649.93,3027.93 ccw(c2632.86,3010.86) 2632.86,3035 ccw(c2632.86,3059.14) R48.2@2649.93,3042.07
NetR54_2: R54.2 S2.3
NetR55_2: R55.2 U4.55 U7.6
NetR56_2: R56.2 U4.53 U7.5
NetR58_2: R58.2 U12.22 | length 220.2
  Top Layer w8: U12.22@2846.97,1328.82 2928.82,1328.82 2942,1342 R58.2@3020,1342 ; R58.2@3007.22,1334.22 ccw(c2988.44,1315.44) 2988.44,1342 ccw(c2988.44,1368.56) R58.2@3007.22,1349.78
NetR59_1: R59.1 U13.2 | length 163.2
  Top Layer w10: R59.1@2470,2060 2594.41,2060 U13.2@2595,2059.41 ; R59.1@2482.07,2052.93 cw(c2499.14,2035.86) 2499.14,2060 cw(c2499.14,2084.14) R59.1@2482.07,2067.07
NetR61_2: R61.2 U4.57 U7.7
NetR62_1: R62.1 U4.67 U9.1
NetU4_62: U4.62 U9.5
NetU4_63: U4.63 U9.2
NetU4_66: U4.66 U9.6
NINT0: U2.8 U13.5 | length 1161.6
  Top Layer w10: v1@1874.7,1719.7 cw(c1861.89,1706.89) 1880,1706.89 cw(c1898.11,1706.89) v1@1885.3,1719.7 ; 1880,1704.24 ccw(c1903.3,1704.24) U2.8@1886.82,1687.77 ; v1(1880,1725) 1880,1656.42 U2.8@1882.01,1654.41 ; v1(2265,1730) v1(2340,1805) ; v1@2265,1737.5 ccw(c2265,1755.61) 2277.8,1742.8 ccw(c2290.61,1730) v1@2272.5,1730 ; v1@2332.5,1805 cw(c2314.39,1805) 2327.2,1792.2 cw(c2340,1779.39) v1@2340,1797.5 ; v1(2425,1930) 2500,1930 2552.64,1982.64 U13.5@2595,1982.64 ; v1@2430.3,1924.7 cw(c2443.11,1911.89) 2443.11,1930 cw(c2443.11,1948.11) v1@2430.3,1935.3
  Bottom Layer w10: v1(1880,1725) 1885,1730 v1(2265,1730) ; v1@1885.3,1719.7 cw(c1910.18,1694.82) 1910.18,1730 ; v1@2259.7,1724.7 ccw(c2246.89,1711.89) 2246.89,1730 ccw(c2246.89,1748.11) v1@2259.7,1735.3 ; v1(2340,1805) 2385,1850 2385,1890 v1(2425,1930) ; v1@2340,1812.5 ccw(c2340,1830.61) 2352.8,1817.8 ccw(c2365.61,1805) v1@2347.5,1805 ; v1@2417.5,1930 cw(c2399.39,1930) 2412.2,1917.2 cw(c2425,1904.39) v1@2425,1922.5
NINT1: U2.9
NLED1: HL3.k U4.137 | length 2255.8
  Top Layer w8: U4.137@3606.31,1873.13 3606.31,1949.4 3587.79,1967.91 3587.79,2061 3675.79,2149 3675.79,2386.6 3898.19,2609 4172.19,2609 4312.79,2749.6 4635.6,2749.6 4980,3094 HL3.k@4980,3195
NLED2: HL4.k U4.138 | length 2228.2
  Top Layer w8: U4.138@3586.62,1873.13 3586.62,1943.62 3568.11,1962.14 3568.11,2066.77 3656.11,2154.77 3656.11,2392.38 3890.73,2627 4164.73,2627 4305.34,2767.6 4628.15,2767.6 4893.57,3033.03 HL4.k@4893.57,3195
NLED3: HL5.k U4.139 | length 2200.5
  Top Layer w8: U4.139@3566.94,1873.13 3566.94,1937.85 3548.42,1956.37 3548.42,2072.54 3636.42,2160.54 3636.42,2398.15 3883.28,2645 4157.28,2645 4297.88,2785.6 4620.69,2785.6 4807.14,2972.05 HL5.k@4807.14,3195
NLED4: HL6.k U4.140 | length 2172.9
  Top Layer w8: U4.140@3547.25,1873.13 3547.25,1932.08 3528.74,1950.6 3528.74,2078.31 3616.74,2166.31 3616.74,2403.92 3875.82,2663 4149.82,2663 4290.43,2803.6 4613.24,2803.6 4720.71,2911.08 HL6.k@4720.71,3195
NLED5: HL7.k U4.141 | length 2185.6
  Top Layer w8: U4.141@3527.57,1873.13 3527.57,1926.31 3509.05,1944.83 3509.05,2084.08 3598,2173.03 3598,2410.63 3868.37,2681 4142.37,2681 4282.97,2821.6 4605.78,2821.6 4683,2898.82 4683,3082 4634.29,3130.71 HL7.k@4634.29,3195
NLED6: HL8.k U4.142 | length 1960.2
  Top Layer w8: U4.142@3507.88,1873.13 3507.88,1920.54 3489.37,1939.05 3489.37,2089.85 3580,2180.48 3580,2418.09 3860.91,2699 4134.91,2699 4275.52,2839.6 4329.6,2839.6 4438,2948 4438,3026 4547.86,3135.86 HL8.k@4547.86,3195
NLED7: HL9.k U4.143 | length 1920.5
  Top Layer w8: U4.143@3488.2,1873.13 3488.2,1914.77 3469.69,1933.28 3469.69,2095.62 3562,2187.94 3562,2425.54 3853.46,2717 4127.46,2717 4268.06,2857.6 4301.6,2857.6 4413,2969 4413,3046 4461.43,3094.43 HL9.k@4461.43,3195
NLED8: HL10.k U4.144 | length 1873.2
  Top Layer w8: U4.144@3468.51,1873.13 3468.51,1909 3450,1927.51 3450,2101.4 3544,2195.4 3544,2433 3846,2735 4120,2735 4375,2990 HL10.k@4375,3195
NOE: U4.122 U5.32 | length 301.3
  Top Layer w8: U5.32@3885.31,2160 3885.31,2105.32 3876,2096 3876,1974 3901.58,1948.42 U4.122@3901.58,1873.13
NPSEN: U2.26 U11.4 | length 985.9
  Top Layer w8: U2.26@1876.48,1171.52 cw(c1863.15,1158.19) 1882.01,1158.19 cw(c1900.87,1158.19) U2.26@1887.53,1171.52 ; U2.26@1882.01,1205.59 1882.01,1112.01 1895.5,1098.51 1895.5,1006.56 1974.57,927.5 2152.5,927.5 v1(2180,900) ; v1@2171.5,900 ccw(c2150.98,900) 2165.49,914.51 ccw(c2180,929.02) v1@2180,908.5 ; v1(2325,920) 2325,918.23 U11.4@2400,918.23 ; v1@2331.01,913.99 cw(c2341.24,903.76) 2341.24,918.23 ; v1@2331.01,926.01 ccw(c2349.8,944.8) 2349.8,918.23
  Bottom Layer w8: v1@2180,891.5 cw(c2180,870.98) 2194.51,885.49 cw(c2209.02,900) v1@2188.5,900 ; v1(2180,900) 2230,850 2285,850 2325,890 v1@2325,925 ; v1@2318.99,913.99 cw(c2304.48,899.48) 2325,899.48 cw(c2345.52,899.48) v1@2331.01,913.99
NRD: U2.13 U11.5 | length 1341.7
  Top Layer w8: U2.13@1720.59,1555.98 1773.56,1555.98 1846.04,1483.5 1958.5,1483.5 v1(1980,1505) ; U2.13@1754.66,1550.46 cw(c1767.99,1537.13) 1767.99,1555.98 cw(c1767.99,1574.84) U2.13@1754.66,1561.51 ; v1@1971.5,1505 cw(c1950.98,1505) 1965.49,1490.49 cw(c1980,1475.98) v1@1980,1496.5 ; v1(2245,920) 2280,920 2307.36,892.64 U11.5@2400,892.64 ; v1@2251.01,913.99 cw(c2265.52,899.48) 2265.52,920 cw(c2265.52,940.52) v1@2251.01,926.01
  Bottom Layer w8: v1(1980,1505) 2020.46,1505 2206.5,1318.96 2206.5,958.5 v1(2245,920) ; v1@1986.01,1498.99 cw(c2000.52,1484.48) 2000.52,1505 cw(c2000.52,1525.52) v1@1986.01,1511.01 ; v1@2236.5,920 ccw(c2215.98,920) 2230.49,934.51 ccw(c2245,949.02) v1@2245,928.5
NRST: C28.2 J2.17 R19.2 U13.10 | length 2654.2
  Top Layer w10: J2.17@1848.84,474.86 ccw(c1806.97,516.73) 1866.18,516.73 ccw(c1925.4,516.73) J2.17@1883.52,474.86 ; J2.17@1855.91,467.79 ccw(c1831.11,492.59) 1866.18,492.59 ccw(c1901.25,492.59) J2.17@1876.45,467.79 ; J2.17@1866.18,457.52 1866.18,541.18 1910,585 C28.2@1910,592 R19.2@1970,592 ; 1879.44,554.44 ccw(c1841.89,592) C28.2@1895,592 ; 1896.51,571.51 ccw(c1876.03,592) C28.2@1905,592 ; C28.2@1922.07,584.93 cw(c1939.14,567.86) 1939.14,592 cw(c1939.14,616.14) C28.2@1922.07,599.07 ; R19.2@1957.93,584.93 ccw(c1940.86,567.86) 1940.86,592 ccw(c1940.86,616.14) R19.2@1957.93,599.07 ; v1(2505,1830) 2510,1830 2534.68,1854.68 U13.10@2595,1854.68 ; v1@2505,1837.5 ccw(c2505,1867.68) 2526.34,1846.34
  Bottom Layer w10: J2.17@1866.18,457.52 1953.66,545 2226.79,545 2266.79,585 2375,585 2495,705 2495,1815 ; J2.17@1866.18,472.05 ccw(c1866.18,507.12) 1890.98,482.32 ccw(c1915.78,457.52) J2.17@1880.71,457.52 ; J2.17@1866.18,482.05 ccw(c1866.18,541.26) 1908.05,499.39 ccw(c1949.92,457.52) J2.17@1890.71,457.52 ; v1@2497.91,1827.56 cw(c2486.39,1823.61) 2495,1815 ; v1(2505,1830) 2510,1830 2495,1815
NWE: U4.107 U5.5 | length 669.6
  Top Layer w8: U4.107@4242.13,1768.8 4293.8,1768.8 4300,1775 4300,1915 4238,1977 4238,2140.16 4295,2197.16 4295,2215 4318.74,2238.74 U5.5@4405,2238.74
NWR: U2.12 U11.6 | length 1397.8
  Top Layer w8: U2.12@1720.59,1587.48 1767.52,1587.48 ; U2.12@1754.76,1582.06 cw(c1767.52,1569.75) 1767.52,1587.48 ; U2.12@1754.76,1592.9 ccw(c1767.52,1605.21) 1767.52,1587.48 ; 1877.41,1505 ccw(c1877.41,1542.59) v1@1903.99,1516.01 ; 1896.72,1505 ccw(c1896.72,1523.28) v1@1909.65,1510.35 ; v1(1910,1510) 1905,1505 1850,1505 1767.52,1587.48 ; v1@2275,876.5 cw(c2275,855.98) 2289.51,870.49 cw(c2304.02,885) v1@2283.5,885 ; v1(2275,885) 2292.95,867.05 U11.6@2400,867.05
  Bottom Layer w8: v1(1910,1510) 1940,1510 1961.5,1531.5 2019.41,1531.5 2224.5,1326.41 2224.5,985.5 2275,935 v1(2275,885) ; v1@1916.01,1503.99 cw(c1930.52,1489.48) 1930.52,1510 cw(c1930.52,1530.52) v1@1916.01,1516.01 ; v1@2268.99,891.01 ccw(c2254.48,905.52) 2275,905.52 ccw(c2295.52,905.52) v1@2281.01,891.01
PC_RXD: P1.1 P1.12 U6.5 | length 1108.4
  Top Layer w10: P1.1@2155,3255 2205,3305 2205,3375 2240,3410 2640,3410 2655,3395 ; P1.1@2155,3269.53 ccw(c2155,3304.6) 2179.8,3279.8 ccw(c2204.6,3255) P1.1@2169.53,3255 ; P1.1@2155,3279.53 ccw(c2155,3338.74) 2196.87,3296.87 ccw(c2238.74,3255) P1.1@2179.53,3255 ; P1.12@2643.88,3376.86 ccw(c2634.65,3395) 2655,3395 ; P1.12@2655,3355 2655,3395 ; P1.12@2666.12,3376.86 cw(c2675.35,3395) 2655,3395
  Bottom Layer w10: P1.12@2655,3330.47 cw(c2655,3271.26) 2696.87,3313.13 cw(c2738.74,3355) P1.12@2679.53,3355 ; P1.12@2655,3340.47 cw(c2655,3305.4) 2679.8,3330.2 cw(c2704.6,3355) P1.12@2669.53,3355 ; P1.12@2655,3355 2737,3273
PC_TXD: P1.6 P1.7 U6.1 | length 1284.8
  Top Layer w10: v1(2431,2663) 2457,2663 2469,2675 U6.1@2490,2675
  Bottom Layer w10: P1.6@2355,3330.47 cw(c2355,3271.26) 2396.87,3313.13 cw(c2438.74,3355) P1.6@2379.53,3355 ; P1.6@2355,3340.47 cw(c2355,3305.4) 2379.8,3330.2 cw(c2404.6,3355) P1.6@2369.53,3355 ; P1.6@2355,3355 P1.7@2455,3255 2455,3155 2391,3091 2391,2703 v1(2431,2663) ; P1.7@2430.47,3255 ccw(c2371.26,3255) 2413.13,3296.87 ccw(c2455,3338.74) P1.7@2455,3279.53 ; P1.7@2437.66,3237.66 cw(c2395.79,3195.79) 2455,3195.79 cw(c2514.21,3195.79) P1.7@2472.34,3237.66 ; P1.7@2440.47,3255 ccw(c2405.4,3255) 2430.2,3279.8 ccw(c2455,3304.6) P1.7@2455,3269.53 ; P1.7@2444.73,3244.73 cw(c2419.93,3219.93) 2455,3219.93 cw(c2490.07,3219.93) P1.7@2465.27,3244.73
PH_SD_CLK: R29.1 T1.5 U4.50 | length 1483.8
  Top Layer w8: U4.50@3724.42,1014.87 3724.42,1074.42 3750,1100 v1(3750,1145) ; v1@3743.99,1138.99 cw(c3729.48,1124.48) 3750,1124.48 cw(c3770.52,1124.48) v1@3756.01,1138.99 ; v1@3935,676.5 cw(c3935,655.98) 3949.51,670.49 cw(c3964.02,685) v1@3943.5,685 ; v1(3935,685) 3963.39,656.61 T1.5@3963.39,600 ; T1.5@3956.47,624.63 ccw(c3939.78,641.33) 3963.39,641.33 ccw(c3987,641.33) T1.5@3970.3,624.63 ; v1(4150,700) R29.1@4200,700 ; v1@4156.01,693.99 cw(c4170.52,679.48) 4170.52,700 cw(c4170.52,720.52) v1@4156.01,706.01 ; R29.1@4192.22,692.22 ccw(c4173.44,673.44) 4173.44,700 ccw(c4173.44,726.56) R29.1@4192.22,707.78
  Bottom Layer w8: v1@3741.5,1145 cw(c3720.98,1145) 3735.49,1130.49 cw(c3750,1115.98) v1@3750,1136.5 ; v1(3750,1145) 3726.5,1121.5 3726.5,1101.5 3693,1068 3693,837.46 3803.96,726.5 3855.98,726.5 3897.48,685 v1(3935,685) 3977.52,685 4019.02,643.5 4093.5,643.5 v1(4150,700) ; v1@3928.99,678.99 ccw(c3914.48,664.48) 3914.48,685 ccw(c3914.48,705.52) v1@3928.99,691.01 ; v1@3941.01,678.99 cw(c3955.52,664.48) 3955.52,685 cw(c3955.52,705.52) v1@3941.01,691.01 ; v1@4141.5,700 cw(c4120.98,700) 4135.49,685.49 cw(c4150,670.98) v1@4150,691.5
PH_SD_WP: U4.72
PH_SOUND: R36.2 R37.1 U4.98 | length 1528.6
  Top Layer w8: v1(4088.27,1590) 4086.64,1591.64 U4.98@4242.13,1591.64 ; v1@4094.29,1583.99 cw(c4112.75,1565.53) 4112.75,1591.64 ; v1@4094.29,1596.01 ccw(c4104.84,1606.57) 4104.84,1591.64 ; v1(4585,2518) R37.1@4596.22,2529.22 ; R36.2@4585.44,2596 cw(c4566.67,2577.22) 4593.22,2577.22 cw(c4619.78,2577.22) R36.2@4601,2596 ; R37.1@4588.44,2556.56 ccw(c4576.91,2568.09) 4593.22,2568.09 ; R37.1@4591.22,2538.78 R37.1@4596.22,2543.78 4593.22,2546.78 R36.2@4593.22,2608.78 ; 4593.22,2582.58 ccw(c4630.02,2582.58) R37.1@4604,2556.56
  Bottom Layer w8: v1@4082.26,1596.01 ccw(c4067.75,1610.52) 4088.28,1610.52 ccw(c4108.8,1610.52) v1@4094.29,1596.01 ; v1(4088.27,1590) 4088.27,1663.28 4585,2160 v1(4585,2518)
PIN0: U2.40 U11.8 | length 1097
  Top Layer w8: U2.40@2169.41,1461.5 v1(2216.5,1461.5) ; U2.40@2203.54,1456.04 cw(c2216.49,1443.39) v1(2216.5,1461.5) ; U2.40@2203.54,1466.95 ccw(c2216.49,1479.6) v1(2216.5,1461.5) ; v1@2210.49,1455.49 ccw(c2195.98,1440.98) 2195.98,1461.5 ccw(c2195.98,1482.02) v1@2210.49,1467.51 ; v1(2285,815) 2286.5,816.5 2399.37,816.5 U11.8@2400,815.87 ; v1@2291.01,808.99 cw(c2309.14,790.86) 2309.14,816.5 ; v1@2291.01,821.01 ccw(c2301.9,831.9) 2301.9,816.5 ; 2377.14,816.5 cw(c2377.14,809.74) U11.8@2381.92,814.52
  Bottom Layer w8: v1@2210.49,1455.49 cw(c2195.98,1440.98) 2216.5,1440.98 cw(c2237.02,1440.98) v1@2222.51,1455.49 ; v1(2216.5,1461.5) 2216.5,1385.33 2260.5,1341.32 2260.5,1004.96 2268.96,996.5 2303.04,996.5 2351.5,948.04 2351.5,891.04 2285,824.54 v1(2285,815) ; v1@2285.5,815 cw(c2309.75,815) 2292.6,832.15 ; v1@2293.5,815 cw(c2337.06,815) 2306.26,845.8
PIN1: U2.41 U11.9 | length 1089.2
  Top Layer w8: U2.41@2169.41,1492.99 2242.01,1492.99 v1(2245,1490) ; U2.41@2203.48,1487.47 cw(c2216.81,1474.13) 2216.81,1492.99 cw(c2216.81,1511.85) U2.41@2203.48,1498.52 ; 2217.26,1492.99 cw(c2217.26,1462.26) v1@2238.99,1483.99 ; 2231.7,1492.99 ccw(c2231.7,1503.3) v1@2238.99,1496.01 ; v1(2335,790) 2335,785 2340.28,790.28 U11.9@2400,790.28 ; v1@2341.01,783.99 cw(c2356.19,768.81) 2356.19,790.28 ; v1@2341.01,796.01 ccw(c2354.86,809.86) 2354.86,790.28
  Bottom Layer w8: v1@2238.99,1483.99 cw(c2229.32,1474.32) 2243,1474.32 ; 2243,1464.64 cw(c2270.36,1464.64) v1@2251.01,1483.99 ; v1(2245,1490) 2243,1488 2243,1384.28 2278.5,1348.78 2278.5,1031 2295,1014.5 2310.5,1014.5 2369.5,955.5 2369.5,883.59 2335,849.09 v1@2335,785 ; v1@2328.99,796.01 ccw(c2314.48,810.52) 2335,810.52 ccw(c2355.52,810.52) v1@2341.01,796.01
PSB: J2.15 R17.2 R18.2 | length 580.7
  Top Layer w8: R18.2@2030,592 R17.2@2090,592 2075,577 2075,466.34 J2.15@2066.18,457.52 ; R18.2@2042.78,584.22 cw(c2061.56,565.44) 2061.56,592 cw(c2061.56,618.56) R18.2@2042.78,599.78 ; J2.15@2048.13,475.57 ccw(c1983.26,540.44) 2075,540.44 ; J2.15@2053.79,469.91 ccw(c2002.58,521.13) 2075,521.13 ; J2.15@2059.44,464.26 ccw(c2021.89,501.81) 2075,501.81 ; 2075,497.86 ccw(c2106.52,497.86) J2.15@2084.23,475.57 ; 2075,541.3 cw(c2135.7,541.3) R17.2@2092.78,584.22 ; 2075,560.62 cw(c2116.38,560.62) R17.2@2087.12,589.88 ; R17.2@2075,579.93 cw(c2097.07,579.93) R17.2@2081.46,595.54 ; R17.2@2077.22,584.22 ccw(c2058.44,565.44) 2058.44,592 ccw(c2058.44,618.56) R17.2@2077.22,599.78
RES5: U2.11